# Altium PCB esp01_relay _hongngoai.PcbDoc
Units mm, origin at the board's own origin, x right, y up, seen from the top; angles counter-clockwise.
Board outline 45 x 47.87 mm, 2 copper layers (Top Layer, Bottom Layer); 30 components, 21 nets, 97 pads, 24 vias.
Unrouted connection lines stored in the file: 4.
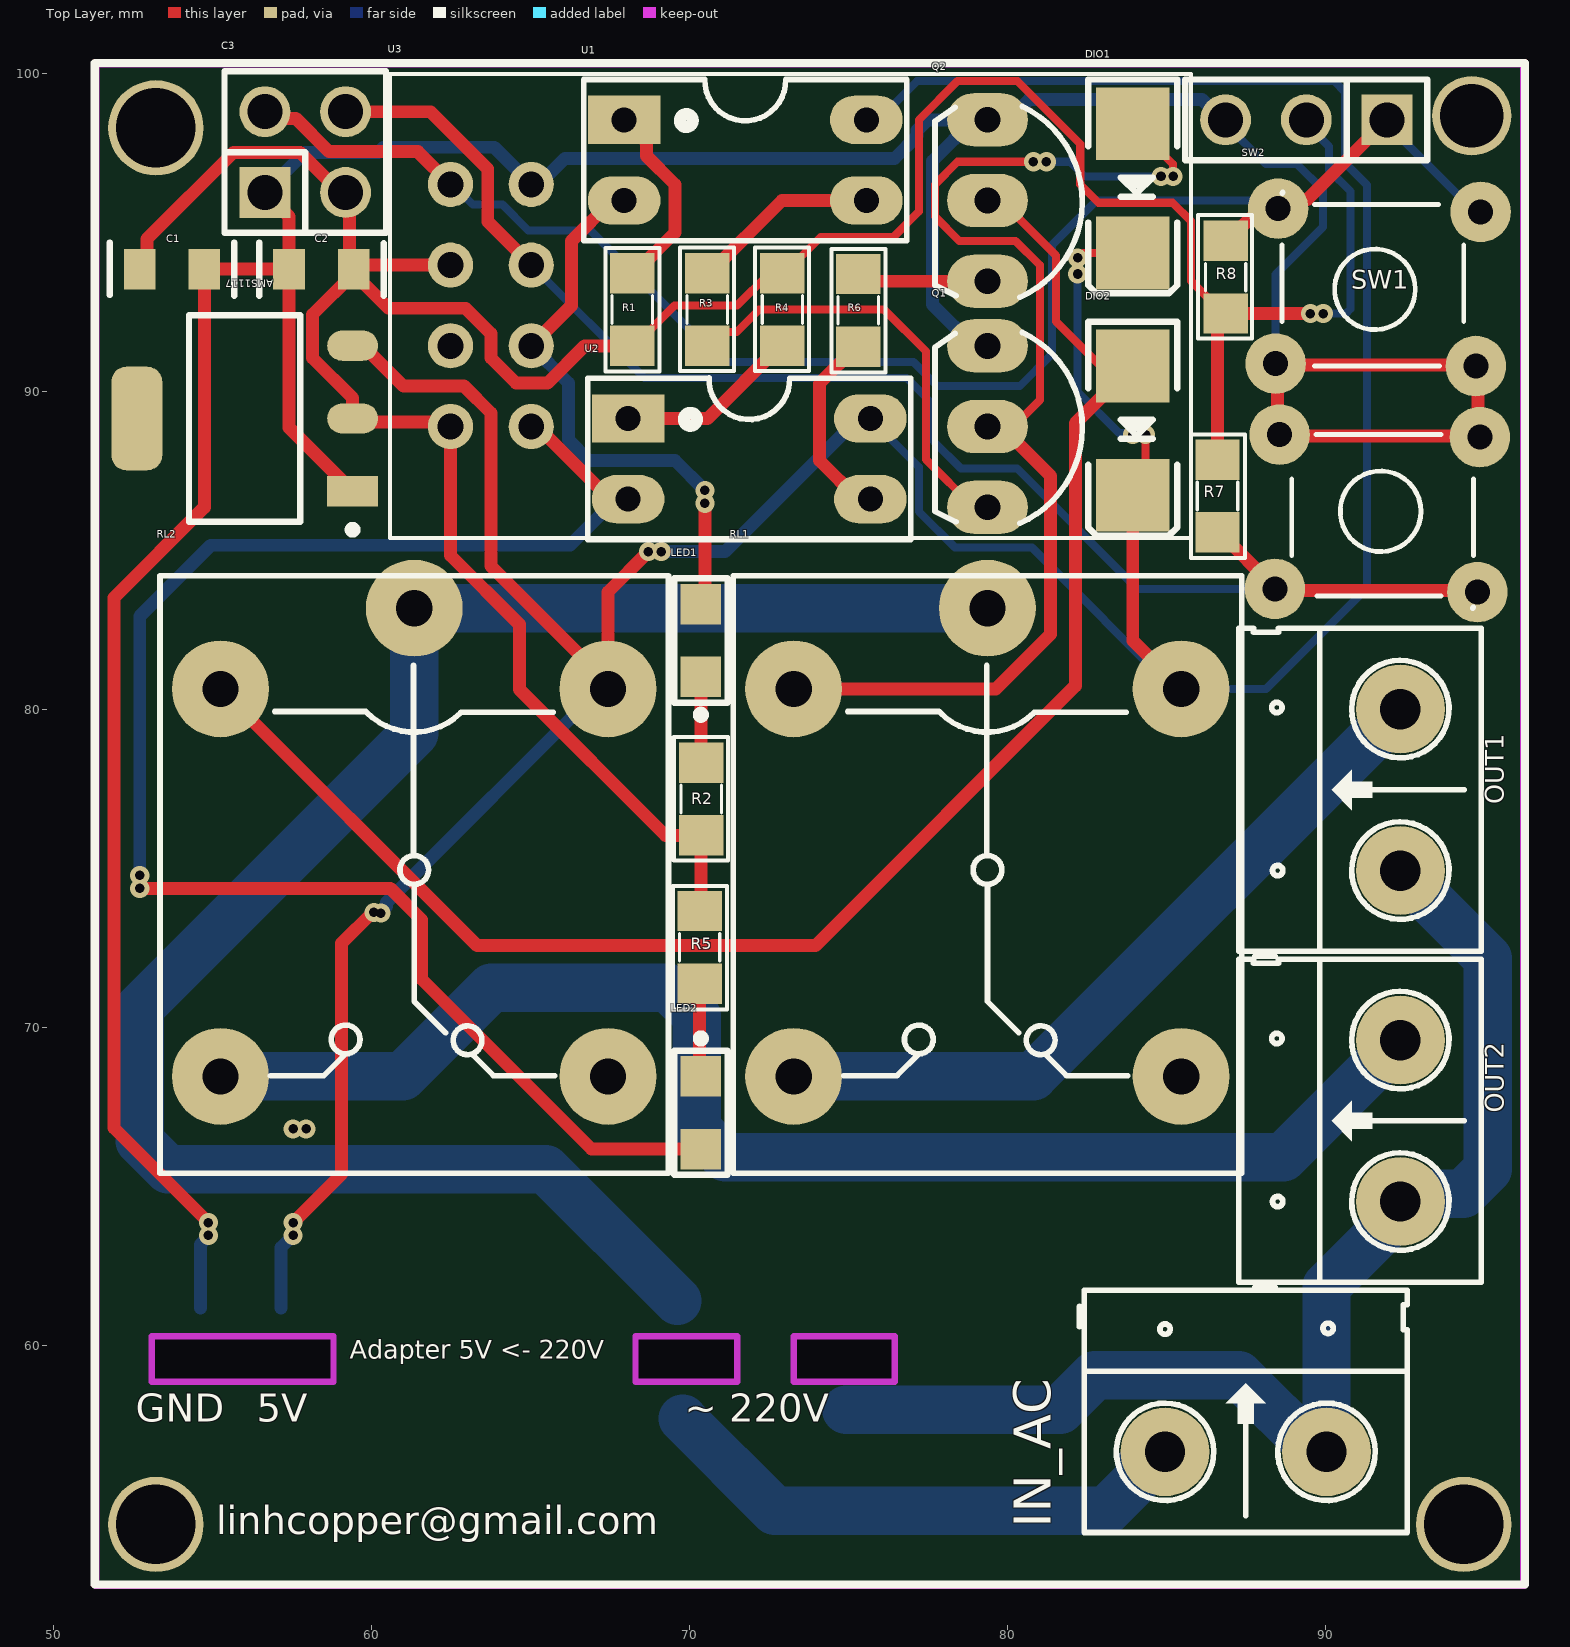
[diagram p0: Top Layer view]
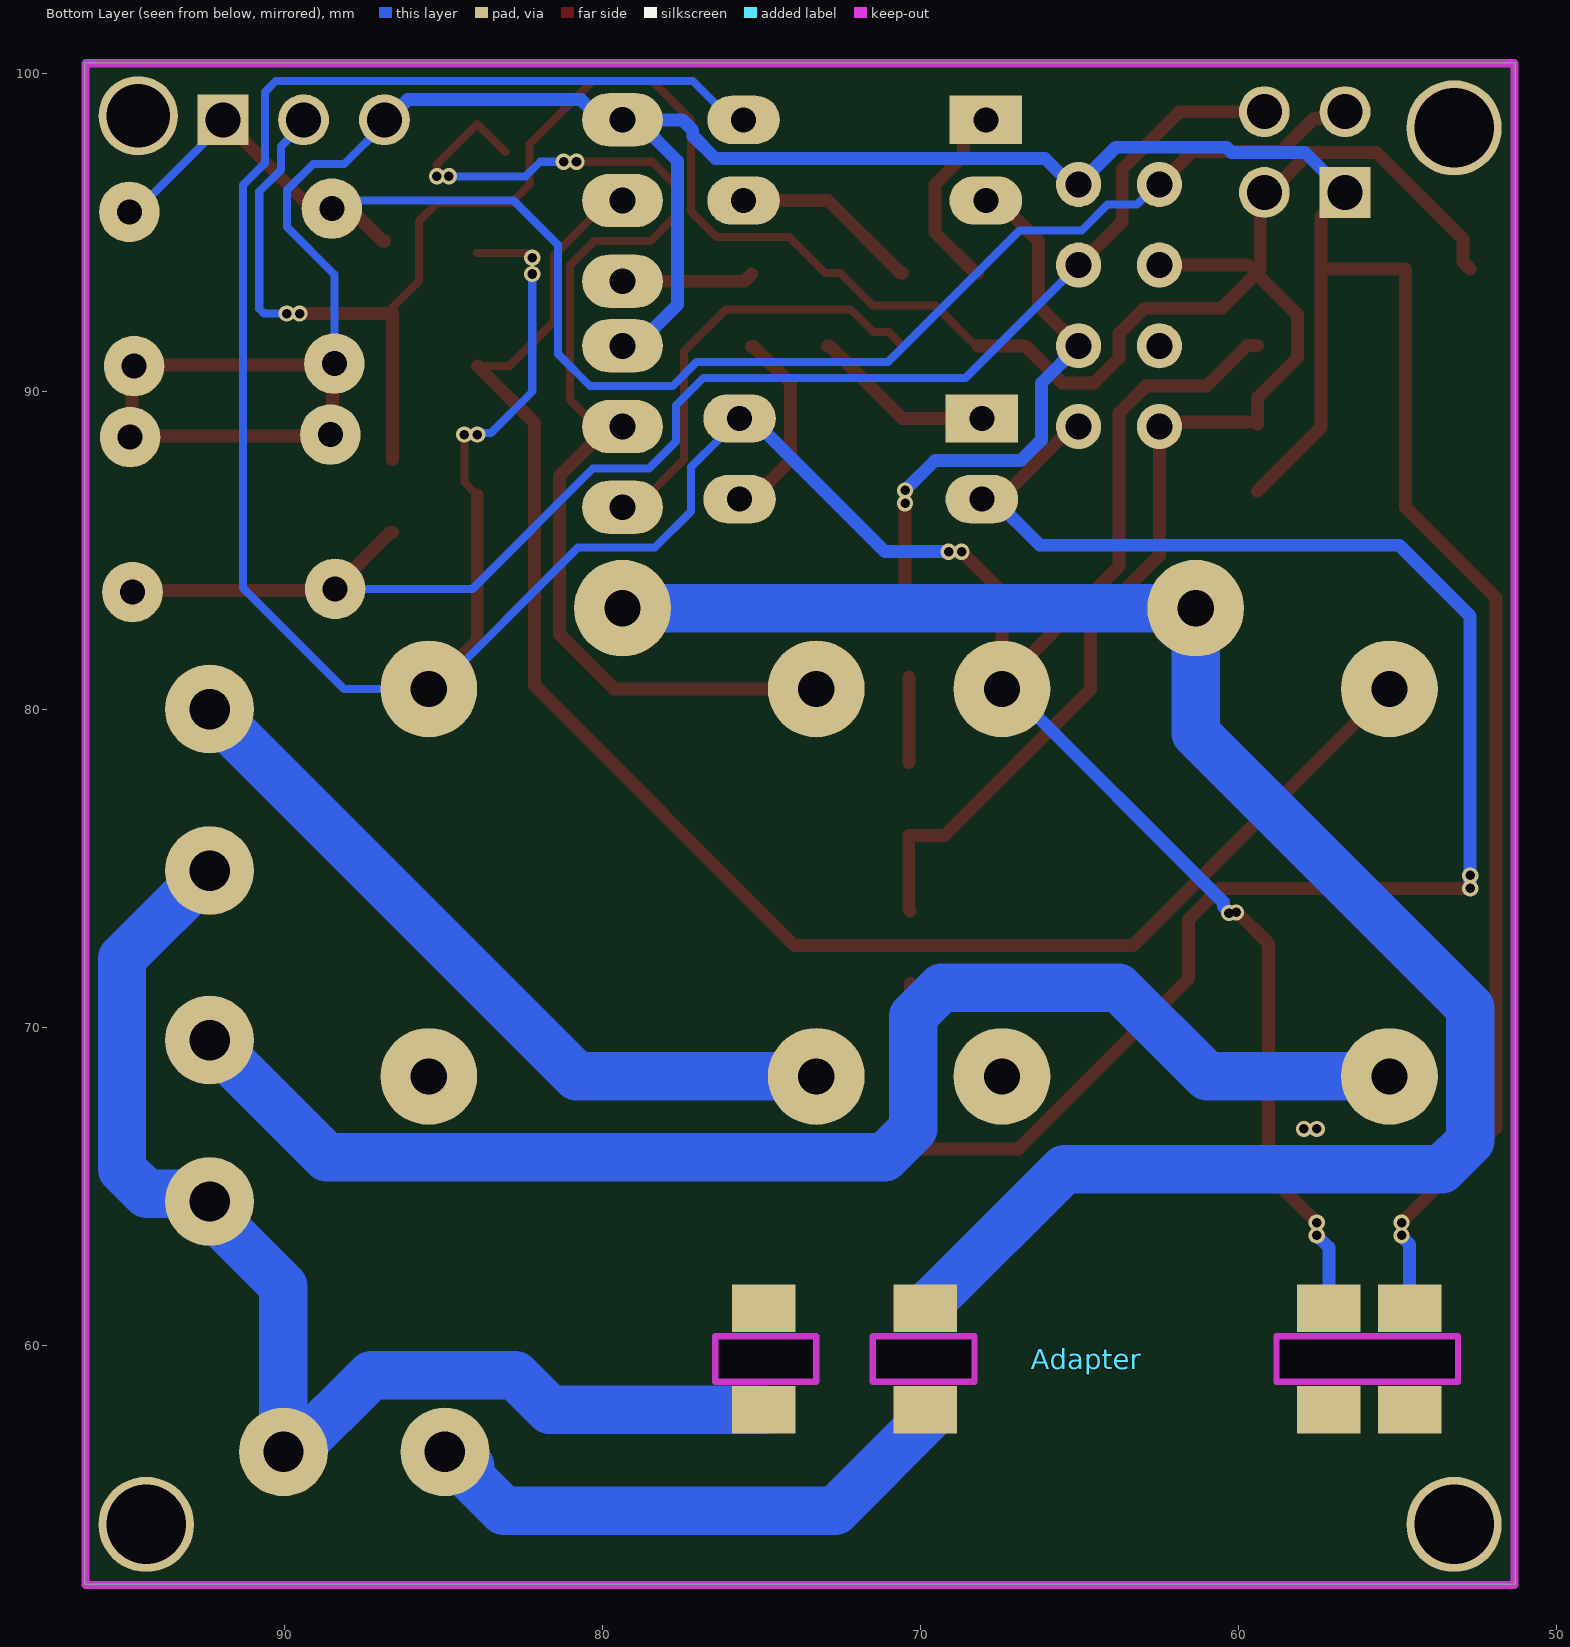
[diagram p1: Bottom Layer view, seen from below]
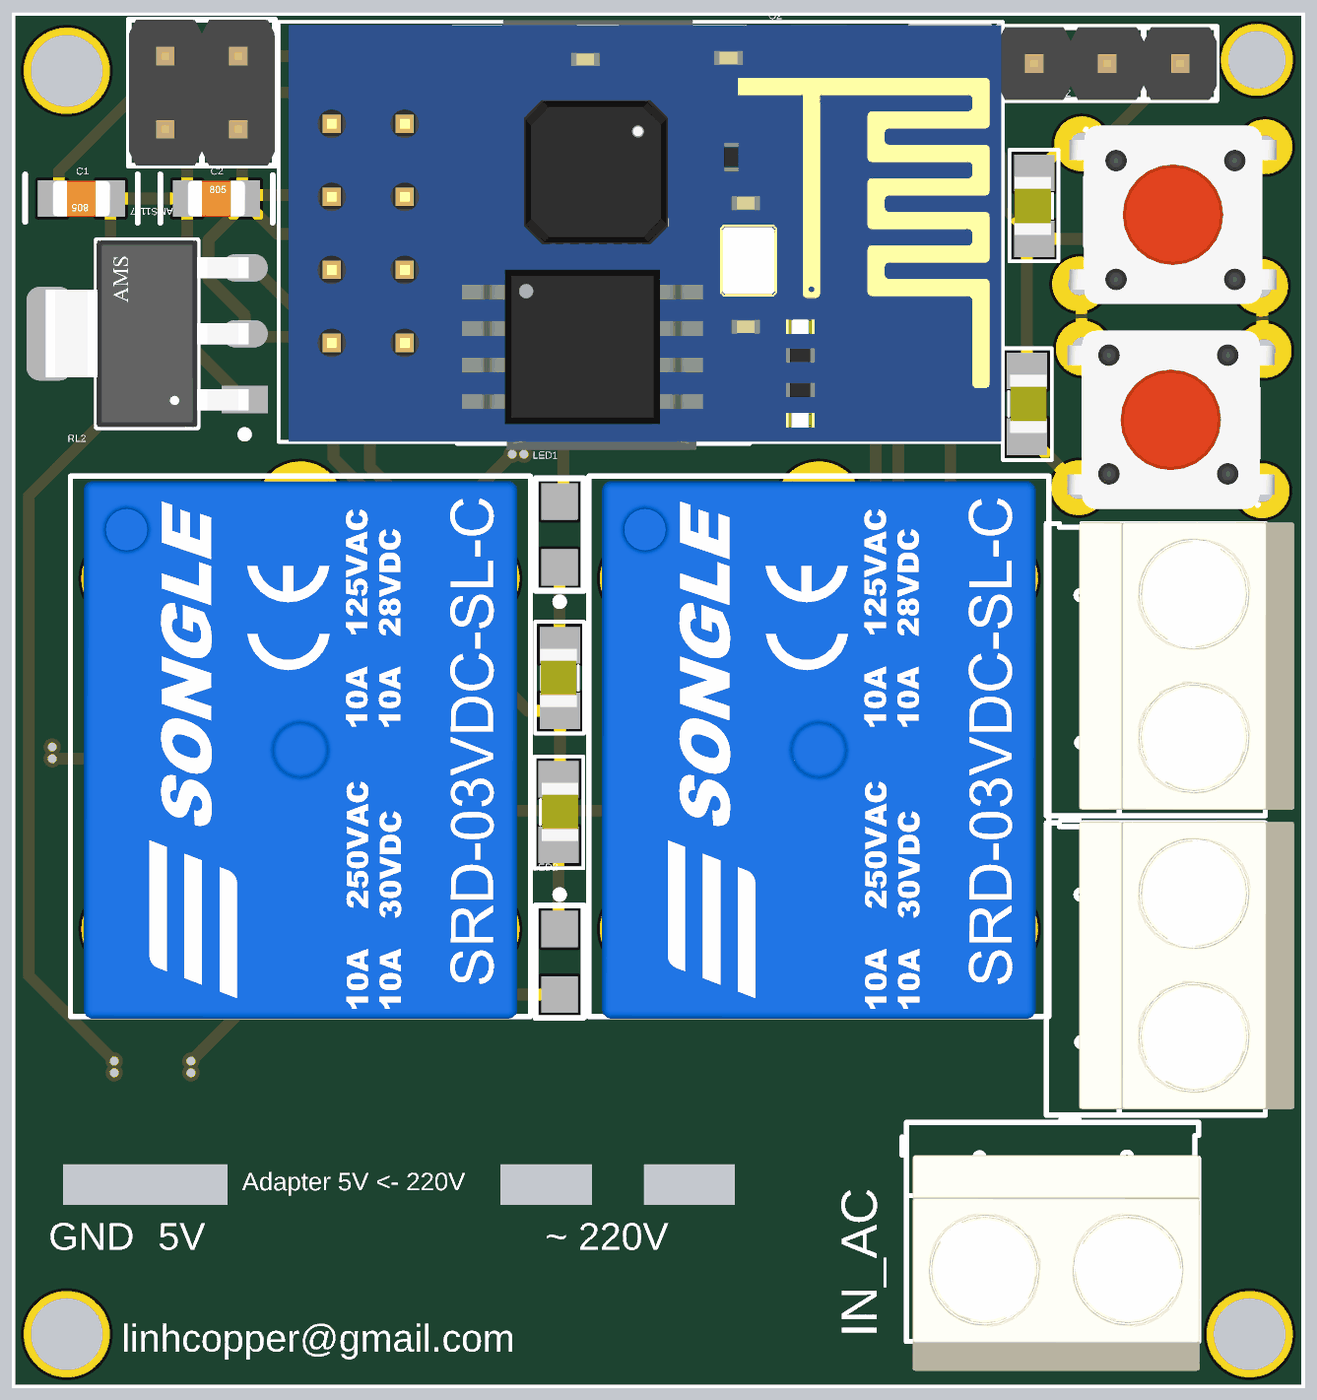
[diagram p2: 3D render of the assembled board from above, using the file's embedded part models]

## Layer stack, top to bottom
Top Solder: solder mask 0.0102, Solder Resist, Dk 3.5
Top Layer: signal copper 0.0356
Dielectric 1: dielectric 0.32, FR-4, Dk 4.8
Bottom Layer: signal copper 0.0356
Bottom Solder: solder mask 0.0102, Solder Resist, Dk 3.5

## Board outline
51.288,52.471 51.288,100.34 96.288,100.34 96.288,52.473 96.286,52.471

## Design rules (kind name [scope] priority, off if disabled: settings)
Clearance [All] p1: gap=0.254 ignorepadtopadclearanceinfootprint=FALSE except(0: Arc-Hole Track-Hole SMDPad-Hole THPad-Hole Via-Hole Fill-Hole Poly-Hole Region-Hole Text-Hole)
PolygonConnect [All] p1: connectstyle=Relief reliefconductorwidth=0.254 reliefentries=4 polygonreliefangle="90 Angle" airgapwidth=0.254
RoutingVias [All] p1: holewidth=0.711 width=1.27 viastyle="Through Hole" minholewidth=0.711 minwidth=1.27 maxholewidth=0.711 maxwidth=1.27
SolderMaskExpansion [All] p1: expansion=0.102 istentingtop=FALSE
Width [All] p1: maxlimit=1.524 minlimit=0.254 preferedwidth=0.406 minimp=50.000000 maximp=50.000000 favimp=50.000000
30 further rules are at their usual default settings.

## Classes and differential pairs
component class esp_relay_hongngoai: AMS1117 C1 C2 C3 DIO1 DIO2 IN_AC LED1 LED2 OUT1 OUT2 Q1 Q2 R1 R2 R3 R4 R5 R6 R7 R8 RL1 RL2 SW1 SW2 U1 U2 U3

## Components (designator, comment, footprint, x,y, rotation, side; value= is the part's Value field where it differs from the comment)
Adapter "power_220v_to_5v" POWER_220V_TO_5V 63.5,59.563 r90 top locked
AMS1117 "AMS1117-3.3" Advanced_Monolithic_Systems_AMS1117_IPC_A 56.007,89.154 r180 top locked
C1 "Capacitor Ceramic" C0805 53.721,93.853 r180 top value=33p
C2 "Capacitor Ceramic" C0805 58.42,93.853 r0 top locked value=33p
C3 "Power" JP2-D2T 57.912,97.536 r0 top locked
C4 "JP3" JP3-D1T 91.948,98.552 r180 top locked
DIO1 "Diode SMD" DIO-SMD-106 83.947,96.393 r90 top locked value=1N5007
DIO2 "Diode SMD" DIO-SMD-106 83.947,88.773 r90 top value=1N5007
IN_AC "" HED2 84.963,56.642 r0 top value="Header 2"
LED1 "" LED0805 70.358,82.169 r90 top locked
LED2 "" LED0805 70.358,67.31 r270 top
OUT1 "" HED2 92.367,74.93 r90 top locked value="Header 2"
OUT2 "" HED2 92.367,64.516 r90 top locked value="Header 2"
Q1 "2SC1815" TO92-123 79.375,88.9 r270 top locked value=C1815
Q2 "2SC1815" TO92-123 79.375,96.012 r270 top locked value=C1815
R1 "" SM-0805 68.199,92.583 r90 top locked value=1K
R2 "" SM-0805 70.369,77.18 r270 top value=1K
R3 "" SM-0805 70.561,92.583 r270 top locked value=1K
R4 "" SM-0805 72.923,92.583 r270 top locked value=1K
R5 "" SM-0805 70.322,72.517 r90 top value=1K
R6 "" SM-0805 75.311,92.558 r90 top value=1K
R7 "" SM-0805 86.614,86.716 r90 top value=1K
R8 "" SM-0805 86.868,93.599 r270 top value=1K
RL1 "Relay 10A/12V" RL_SPDT_10A 79.375,83.185 r270 top locked value="Relay SPDT, 10A, 12V"
RL2 "Relay 10A/12V" RL_SPDT_10A 61.341,83.185 r270 top locked value="Relay SPDT, 10A, 12V"
SW1 "SW" SW4 88.57,88.646 r0 top locked value="Button chip 4 pin"
SW2 "SW" SW4 94.742,90.805 r180 top locked value="Button chip 4 pin"
U1 "PC817" DIP4 67.945,98.552 r270 top locked
U2 "PC817" DIP4 68.072,89.154 r270 top locked
U3 "ESP-01" ESP8266 63.932,92.761 r90 top locked

## Footprints (in the part's own frame and the unit in brackets; to place one, negate y for a bottom-side part, rotate by r counter-clockwise, add the part's x,y. Pads: shape width x height; smd on the part's side, far side on the other; paste and mask are expansions set on the pad)
Advanced_Monolithic_Systems_AMS1117_IPC_A [mm]
  rect 1.604x0.952 smd paste+0 mask+0: 1(-3.395,2.29)
  rrect100% 1.604x0.952 smd paste+0 mask+0: 2(-3.395,0) 3(-3.395,-2.29)
  rrect59% 1.604x3.262 smd paste+0 mask+0: 4(3.395,0)
  silkscreen extent -3.52,-3.25 1.75,3.62, body extent -4.7,-3.75 4.7,3.75, height 0.25
C0805 [mm] "Chip Resistor; Body 2.0 x 1.3 mm (LxW typ)"
  rect 1x1.27 smd: 1(-1.016,0) 2(1.016,0)
  silkscreen extent -1.96,-0.84 1.96,0.84, body extent -1,-0.62 1,0.63, height 0.78
DIO-SMD-106 [mil]
  rect 90x90.55 smd: 1(80,0) 2(-80,0)
  silkscreen extent -130,-55 135,55, body extent -99,-50 106,52, height 95
DIP4 [mil]
  rect 60x90 hole 31: 1(0,0)
  oval 60x90 hole 31: 2(100,0) 3(100,300) 4(0,300)
  silkscreen extent -50,-50 150,350, body extent -59,-10 159,305, height 170
ESP8266 [mil]
  round 56 hole 32: 1(148,57) 2(48,57) 3(-52,57) 4(-152,57) 5(-152,-43) 6(-52,-43) 7(48,-43) 8(148,-43)
  silkscreen extent -290,-860 285,132, body extent -290,-858 281,118, height 566
HED2 [mil] "Header 2, 2 pin, hight 300mil, Pin to Pin 200, Colour Green"
  round 110 hole 50: 1(0,0) 2(200,0)
  silkscreen extent -106,-100 300,200, body extent -92,-140 302,155, height 394
JP2-D2T [mm] "4 pins, dual pin, straight, gold plating"
  rect 1.6x1.6 hole 1.1: 1(-1.27,-1.27)
  round 1.6 hole 1.1: 2(1.27,-1.27) 3(1.27,1.27) 4(-1.27,1.27)
  silkscreen extent -2.54,-2.54 2.54,2.54, body extent -2.54,-2.54 2.54,2.54, height 8.55
JP3-D1T [mm] "3 pins, 1 row, straight, gold plating"
  rect 1.6x1.6 hole 1.1: 1(0,0)
  round 1.6 hole 1.1: 2(2.54,0) 3(5.08,0)
  silkscreen extent -1.27,-1.27 6.35,1.27, body extent -1.27,-1.27 6.35,1.27, height 8.54
LED0805 [mil] "Chip Resistor; Body 2.0 x 1.3 mm (LxW typ)"
  rect 50x50 smd: 1(-45,0) 2(45,0)
  silkscreen extent -97,-33 77,33, body extent -60,-25 60,25, height 47
POWER_220V_TO_5V [mm]
  rect 1.5x2 smd far side: 1(-1.601,-11.43) 1(1.601,-11.43) 2(-1.601,-6.35) 2(1.601,-6.35) 3(-1.601,6.35) 3(1.601,6.35) 4(-1.601,8.89) 4(1.601,8.89)
  Keep-Out Layer board cut-out: -0.711,4.699 -0.711,10.414 0.711,10.414 0.711,4.699
  Keep-Out Layer board cut-out: -0.711,-7.976 0.711,-7.976 0.711,-4.801 -0.711,-4.801
  Keep-Out Layer board cut-out: -0.711,-12.954 0.711,-12.954 0.711,-9.779 -0.711,-9.779
  Keep-Out Layer lines w0.2: -0.711,10.414 0.711,10.414 0.711,4.699 -0.711,4.699 -0.711,10.414 ; -0.711,-4.801 0.711,-4.801 0.711,-8.001 -0.711,-8.001 -0.711,-4.801 ; -0.711,-9.779 0.711,-9.779 0.711,-12.954 -0.711,-12.954 -0.711,-9.779
RL_SPDT_10A [mil] "Relay SPDT, 5 pin, 10A,W 650mil, L 800mil, H 800mil"
  round 120 hole 45: 1(0,0) 2(580,240) 3(580,-240) 4(100,-240) 5(100,240)
  silkscreen extent -40,-315 700,315, body extent -33,-297 703,297, height 588
SM-0805 [mil] "Compoment SMD 80x50mil"
  rect 50x55 smd: 1(-45,0) 2(45,0)
  silkscreen extent -77,-34 76,33, body extent -40,-27 40,23, height 24
SW4 [mil] "SW button 4pin, 250 x250 mil"
  round 75 hole 31: 1(0,0) 2(245,-195) 3(248,-3) 4(-6,-191)
  silkscreen extent 15,-215 240,0, body extent -36,-220 276,24, height 276
TO92-123 [mil] "TO-92"
  oval 66x100 hole 32: 1(-100,0) 2(0,0) 3(100,0)
  silkscreen extent -117,-65 120,118, body extent -109,-66 109,95, height 245

## Part data
C1 C2: library part CapSMD, "Capacitor", LatestRevisionDate=17-Jul-2002, LatestRevisionNote="Re-released for DXP Platform.", PackageReference=RAD-0.3, Published=8-Jun-2000, Publisher="Altium Limited"
C3: library part JP2x2, "WR-PHD 2.54 mm Dual Socket Header", Manufacturer="W¨¹rth Elektronik eiSos GmbH", partNo=61300421821, ComponentLink1 Description=Manufacturer, ComponentLink1URL=http://www.we-online.com, ComponentLink2 Description=Datasheet, ComponentLink2URL=http://katalog.we-online.de/em/datasheet/6130xx21821.pdf, Created by="Karrer Zheng", Created Date="29 March 2013", NoPins=04
C4: "WR-PHD 2.54 mm Angled Socket Header", Manufacturer="W¨¹rth Elektronik eiSos GmbH", partNo=613003143121, ComponentLink1 Description=Manufacturer, ComponentLink1URL=http://www.we-online.com, ComponentLink2 Description=Datasheet, ComponentLink2URL=http://katalog.we-online.de/em/datasheet/6130xx143121.pdf, Created by="Karrer Zheng", Created Date="29 March 2013", NoPins=03
DIO1 DIO2: "Default Diode", Code - JEDEC=DO-214-AB, Published=8-Jun-2000, Publisher="Altium Limited", Revision="July-2002: Re-released for DXP Platform."
IN_AC OUT1 OUT2: library part Hed2, "Header 2 (Green)"
LED1 LED2: library part LED0805, "LED SMD 0805"
Q1 Q2: "NPN 600mW, ECB"
R1 R2 R3 R4 R5 R6 R7 R8: library part RM, "Resistor SMD"
RL1 RL2: library part "Relay 1", "Relay SPDT,10A - 12VDC 5 Pin"
SW1 SW2: library part SW4, "Switch button 4 pin"
U1 U2: "Single Opto"
U3: library part ESP8266-01, "ESP-12 Wi-Fi Module"

## Free pads (board coordinates)
  round 3 hole 2.5: 1(53.213,54.356) 1(53.213,98.298) 1(94.361,54.356)
  round 2.5 hole 2: 1(94.615,98.679)

## Via types
v1: diameter 0.6/0.508 (per signal layer), hole 0.3, Top Layer to Bottom Layer, tented both sides, 24 vias

## Nets (pads, with @x,y where several pads share a name; then routed paths per layer and width w, separated by ;. In a path a pad name is that pad's centre, name@x,y a point inside that pad or via, vN(x,y) a via of type N, cw(c..) or ccw(c..) an arc to the next point about the centre after c; other vN are vias at no path point)
3V: AMS1117.2 C1.2 C2.2 C3.2 C4.2 R1.1 R2.2 R4.1 R5.2 R7.2 R8.2 U3.2 U3.4 | length 97.2
  Top Layer w0.254: R1.1 68.263,91.44 69.532,92.71 71.501,92.71 72.517,93.726 R4.1 72.987,93.726 74.13,94.869 76.419,94.869 77.216,95.666 77.216,98.549 78.438,99.771 80.315,99.771 82.296,97.79 82.296,96.52 82.874,95.942 85.198,95.942 85.776,95.364 85.776,93.485 R8.2@86.804,92.456
  Top Layer w0.406: C1.2 52.936,94.084 52.936,94.806 55.653,97.523 57.753,97.523 59.01,96.266 C3.2 59.309,96.139 C2.2@59.309,93.845 ; AMS1117.2@59.402,88.984 59.402,89.798 58.143,91.057 58.143,92.425 C2.2@59.436,93.718 ; AMS1117.2@59.506,89.05 62.334,89.05 U3.4 62.484,84.844 64.647,82.68 64.647,80.633 69.244,76.037 R2.2 70.369,73.708 R5.2 ; U3.2 59.698,93.98 C2.2@59.436,93.718 ; R1.1 66.706,91.44 65.538,90.272 64.54,90.272 63.754,91.058 63.754,91.822 62.955,92.622 60.532,92.622 C2.2@59.436,93.718 ; R7.2 86.614,92.456 86.804,92.456 R8.2 v1(89.535,92.456)
  Bottom Layer w0.254: C4.2 89.408,98.425 90.119,97.714 90.119,96.978 90.805,96.292 90.805,92.605 90.656,92.456 v1@90.043,92.456
  other v1: 89.941,92.456
5V: Adapter.3 AMS1117.3 DIO1.2 DIO2.2 RL1.5 RL2.5 U1.4 U2.4 | length 121.3
  Top Layer w0.254: v1(82.215,94.21) 82.271,94.266 82.295,94.266 82.39,94.361 DIO1.2 ; DIO2.2 84.353,87.147 v1(84.353,88.646)
  Top Layer w0.406: v1(57.531,63.856) 59.055,65.38 59.055,72.644 60.025,73.614 v1(60.071,73.614) ; AMS1117.3 59.728,91.444 61.002,90.17 62.913,90.17 63.754,89.329 63.754,84.508 RL2.5@67.437,80.825 ; RL2.5 RL2.5@67.437,80.825 ; v1(68.707,84.963) 67.437,83.693 RL2.5@67.437,80.825 ; DIO2.2 83.947,82.169 RL1.5
  Bottom Layer w0.254: U1.4 75.946,98.552 77.165,99.771 89.412,99.771 90.285,99.771 90.627,99.429 90.627,97.188 91.313,96.502 91.313,83.82 88.138,80.645 RL1.5 ; U2.4 75.729,89.154 76.316,88.567 76.316,88.53 77.216,87.63 77.216,86.233 78.359,85.09 80.772,85.09 RL1.5@85.344,80.518 ; v1(82.215,93.701) 82.215,89.997 83.517,88.695 83.898,88.695 v1(83.947,88.646)
  Bottom Layer w0.406: Adapter.3@57.15,61.164 57.15,63.068 v1(57.531,63.449) ; v1(60.294,73.592) 60.294,73.619 60.471,73.797 60.471,73.933 67.183,80.645 RL2.5 ; v1(69.113,84.963) 71.12,84.963 75.311,89.154 U2.4
220L: Adapter.2 IN_AC.1 RL1.1 RL2.1 | length 75.1
  Bottom Layer w1.524: Adapter.2@69.624,61.39 65.482,65.532 53.594,65.532 52.705,66.421 52.705,70.612 61.341,79.248 RL2.1 RL1.1@78.994,83.185 ; Adapter.2@69.783,57.691 72.687,54.787 83.108,54.787 IN_AC.1 84.619,56.642 IN_AC.1@84.162,56.184
220N: Adapter.1 IN_AC.2 OUT1.1 OUT2.1 | length 39.1
  Bottom Layer w1.524: Adapter.1@74.93,57.962 81.661,57.962 82.753,59.055 87.286,59.055 89.699,56.642 IN_AC.2 90.043,61.848 92.367,64.172 OUT2.1 92.61,64.759 94.35,64.759 95.123,65.532 95.123,72.174 OUT1.1
GND: Adapter.4 AMS1117.1 C1.1 C2.1 C3.1 C4.3 Q1.1 Q2.1 SW1.1 SW1.3 SW2.1 SW2.3 U3.8 | length 116.1
  Top Layer w0.406: v1(54.864,63.856) 51.892,66.827 51.892,83.515 54.737,86.36 C1.1 C2.1 ; C3.1 57.404,95.504 C2.1 ; AMS1117.1 57.404,88.862 C2.1 ; SW2.3 SW2.3@88.481,90.843 ; SW1.3 SW1.3@94.831,88.608 ; SW2.3@88.481,90.843 94.704,90.843 SW2.1 94.805,90.742 94.805,88.633 SW1.3@94.831,88.608 ; SW2.3@88.481,90.843 88.506,90.818 88.506,88.709 SW1.1 88.608,88.608 SW1.3@94.831,88.608
  Bottom Layer w0.254: C4.3 86.868,98.425 88.138,97.155 89.116,97.155 89.929,96.342 89.929,95.174 88.443,93.688 SW2.3
  Bottom Layer w0.406: Adapter.4@54.61,61.164 54.61,63.168 54.864,63.422 v1(54.864,63.449) ; C3.1 57.899,97.523 60.21,97.523 60.375,97.688 63.856,97.688 U3.8 ; U3.8@65.266,96.52 66.079,97.333 76.451,97.333 77.165,98.047 77.165,98.222 77.495,98.552 78.943,98.552 77.648,97.257 77.648,92.735 78.943,91.44 Q1.1 ; Q2.1 80.045,98.552 80.68,99.187 86.131,99.187 C4.3@86.893,98.425
GPIO0: LED1.2 U1.2 U3.6 | length 17.6
  Top Layer w0.406: U3.6 66.284,92.7 66.284,94.732 67.564,96.012 U1.2 ; LED1.2 70.485,83.439 v1(70.485,86.487)
  Bottom Layer w0.406: U3.6 66.192,90.272 66.192,88.482 66.841,87.833 69.545,87.833 v1(70.485,86.893)
GPIO1: LED2.2 U2.2 U3.5 | length 51.7
  Top Layer w0.406: v1(52.705,74.371) 60.585,74.371 61.573,73.384 61.573,71.516 66.921,66.167 LED2.2 ; U3.5@65.075,88.951 U3.5 65.214,88.9 67.5,86.614 U2.2
  Bottom Layer w0.406: v1(52.705,74.371) v1(52.705,74.778) 52.705,82.931 54.94,85.166 66.243,85.166 67.691,86.614 U2.2
GPIO2: C3.3 R7.1 SW1.2 SW1.4 U3.7 | length 46.1
  Top Layer w0.406: C3.3 61.85,98.806 63.652,97.004 63.652,95.352 U3.7 ; R7.1 86.677,85.573 88.417,83.833 SW1.4 88.468,83.744 94.742,83.744 SW1.2
  Bottom Layer w0.254: U3.7 68.58,90.424 76.835,90.424 77.687,89.572 77.687,88.432 78.54,87.579 80.312,87.579 84.096,83.795 SW1.4
GPIO3: C3.4 C4.1 R8.1 SW2.2 SW2.4 U3.1 | length 50.4
  Top Layer w0.406: C3.4 56.851,98.597 57.613,98.597 58.661,97.549 61.455,97.549 U3.1 ; R8.1 86.931,94.742 87.661,95.471 88.232,95.471 88.806,96.045 89.441,96.045 91.821,98.425 C4.1@91.948,98.425 ; SW2.4@94.844,95.707 SW2.4
  Bottom Layer w0.254: U3.1 62.548,96.52 63.183,95.885 64.114,95.885 64.927,95.072 66.887,95.072 71.028,90.932 77.045,90.932 77.807,90.17 80.391,90.17 81.407,91.186 81.407,94.615 82.804,96.012 SW2.2@88.265,96.012 ; C4.1@91.948,98.425 94.717,95.656 SW2.4
NetDIO1_1: DIO1.1 Q1.2 RL1.4 | length 37.8
  Top Layer w0.254: Q1.2 79.807,88.9 80.192,88.9 81.026,89.734 81.026,93.977 80.261,94.742 78.489,94.742 77.724,95.507 77.724,96.517 78.438,97.231 v1(80.823,97.231) ; DIO1.1@83.058,97.536 DIO1.1 85.217,97.155 v1(85.217,96.774)
  Top Layer w0.406: RL1.4 79.637,80.645 81.356,82.364 81.356,87.351 Q1.2@79.807,88.9
  Bottom Layer w0.254: v1(81.229,97.231) 81.966,97.231 82.423,96.774 v1(84.836,96.774)
NetDIO2_1: DIO2.1 Q2.2 RL2.4 | length 52.4
  Top Layer w0.254: Q2.2 79.807,96.012 81.534,94.285 81.534,94.188 ; 81.534,94.187 81.534,92.202 82.931,90.805 DIO2.1@83.94,90.805
  Top Layer w0.406: RL2.4 63.322,72.568 73.965,72.568 82.14,80.743 82.14,89.005 DIO2.1@83.94,90.805
NetLED1_1: LED1.1 R2.1 | length 2.7
  Top Layer w0.406: LED1.1 70.358,78.334 R2.1
NetLED2_1: LED2.1 R5.1 | length 2.9
  Top Layer w0.406: R5.1 70.322,68.489 LED2.1
NetQ1_3: Q1.3 R3.2 | length 13.9
  Top Layer w0.254: R3.2 70.998,91.877 71.488,91.877 72.194,92.583 76.123,92.583 77.437,91.269 77.437,87.866 78.943,86.36 Q1.3
NetQ2_3: Q2.3 R6.2 | length 4.2
  Top Layer w0.406: R6.2 75.54,93.472 Q2.3
NetR1_2: R1.2 U1.1 | length 6.1
  Top Layer w0.406: U1.1 68.644,97.853 68.644,97.418 69.545,96.517 69.545,95.009 68.263,93.726 R1.2
NetR3_1: R3.1 U1.3 | length 6
  Top Layer w0.406: R3.1 70.625,93.726 72.911,96.012 U1.3
NetR4_2: R4.2 U2.1 | length 5.8
  Top Layer w0.406: U2.1 70.574,89.154 72.86,91.44 R4.2
NetR6_1: R6.1 U2.3 | length 6.2
  Top Layer w0.406: R6.1 75.248,91.415 74.092,90.259 74.092,87.833 75.311,86.614 U2.3
OUT1: OUT1.2 RL1.3 | length 23.9
  Bottom Layer w1.524: RL1.3 80.81,68.453 OUT1.2
OUT2: OUT2.2 RL2.3 | length 44.1
  Bottom Layer w1.524: RL2.3 60.976,68.453 63.77,71.247 69.338,71.247 70.231,70.354 70.231,66.806 71.124,65.913 88.684,65.913 OUT2.2
pads on no net: AMS1117.4 RL1.2 RL2.2 U3.3
copper on no net:
  other v1: 57.531,66.802 57.937,66.802

## Keep-outs
Keep-Out Layer:
  lines w0.254: 86.741,100.33 96.266,100.33 96.266,52.451 51.308,52.451 51.308,100.33 87.122,100.33

## Other copper
Top Layer:
  region: 55.245,80.645

## Silkscreen, mask and mechanical layers (free items; w line width, h text height)
Top Overlay:
  lines w0.2: 96.286,52.471 96.288,52.473
  lines w0.254: 96.286,52.471 91.313,52.471 51.288,52.471 51.288,100.34 96.288,100.34 96.288,52.473
  text "Adapter 5V <- 220V" at 59.309,59.36 h1
  text "GND" at 52.578,57.294 h1.52
  text "5V" at 56.388,57.294 h1.52
  text "~ 220V" at 69.85,57.294 h1.52
  text "linhcopper@gmail.com" at 55.118,53.755 h1.52